# Altium PCB SERC_PCB_V2.PcbDoc
Units mil, origin at the board's own origin, x right, y up, seen from the top; angles counter-clockwise.
Board outline 6000 x 4000 mil, 2 copper layers (Top Layer, Bottom Layer); 39 components, 43 nets, 150 pads, 12 vias.
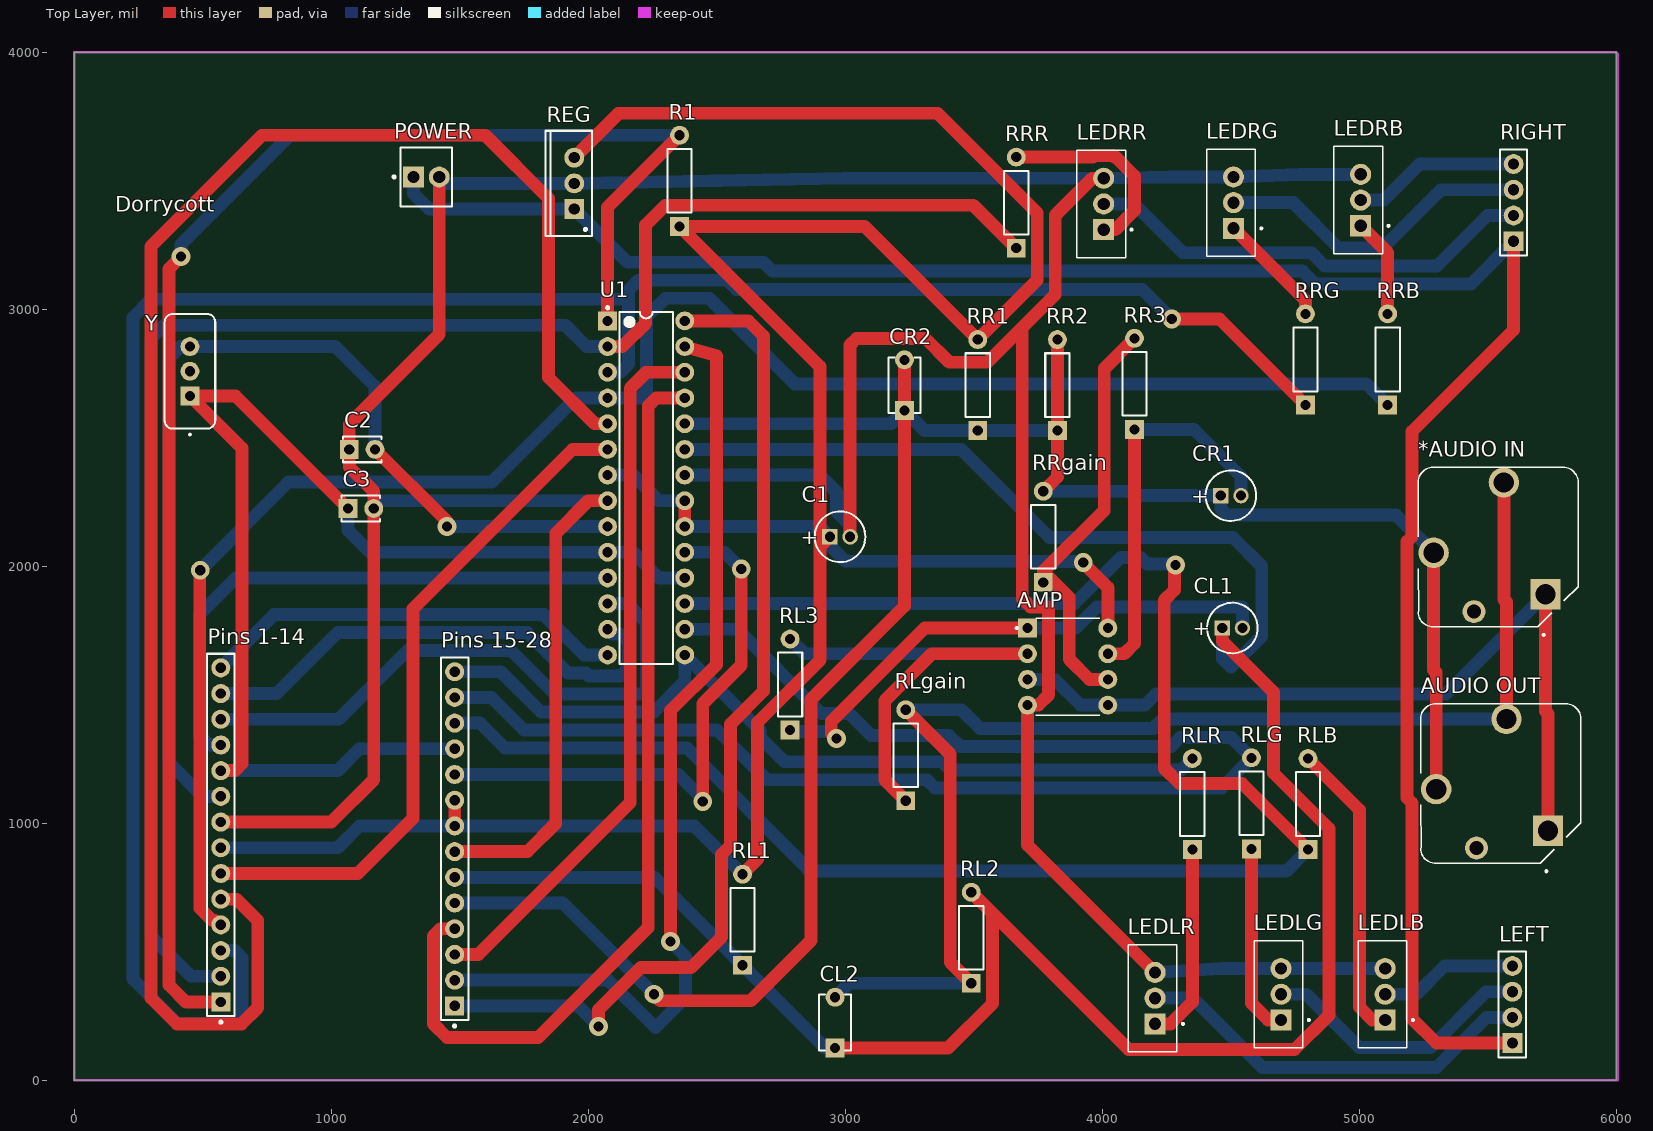
[diagram p0: Top Layer view]
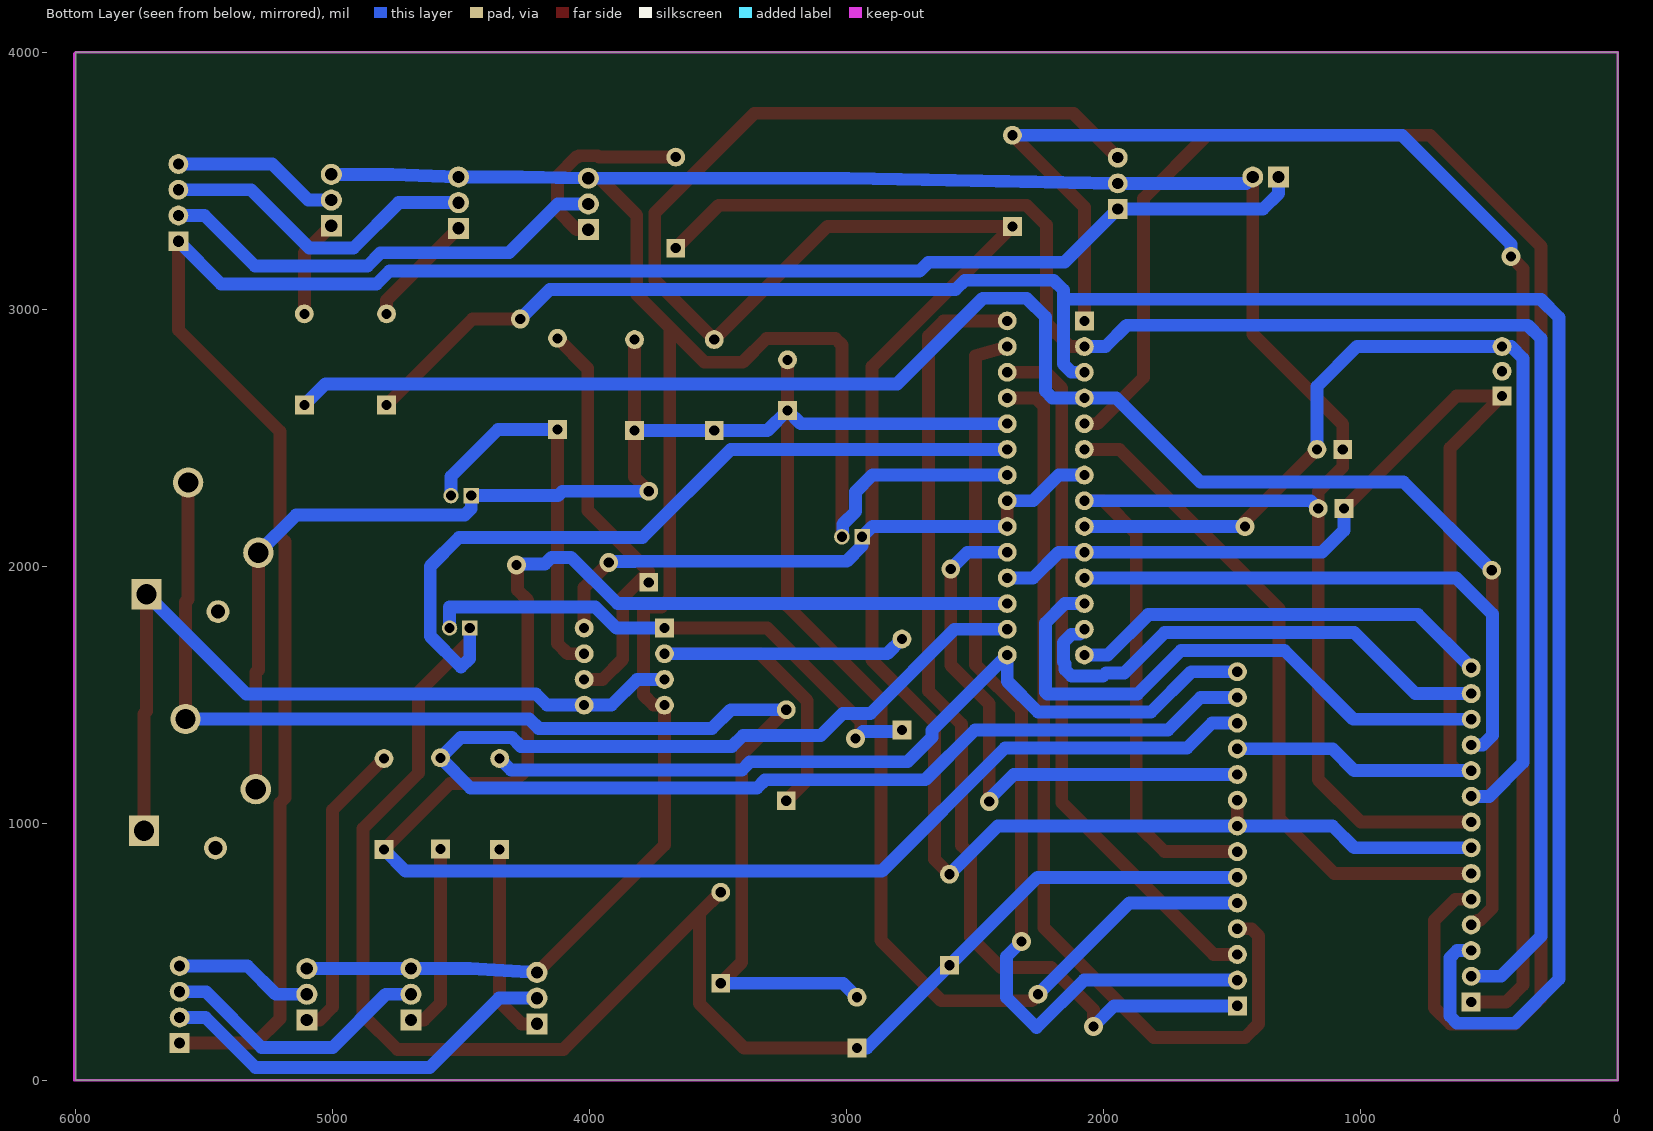
[diagram p1: Bottom Layer view, seen from below]

## Layer stack, top to bottom
Top Solder: solder mask 0.4, Solder Resist, Dk 3.5
Top Layer: signal copper 1.4
Dielectric 1: dielectric 12.6, FR-4, Dk 4.8
Bottom Layer: signal copper 1.4
Bottom Solder: solder mask 0.4, Solder Resist, Dk 3.5

## Board outline
0,0 6000,0 6000,4000 0,4000

## Design rules (kind name [scope] priority, off if disabled: settings)
BoardOutlineClearance [All] p1: gap=12 ignorepadtopadclearanceinfootprint=FALSE
Clearance [All] p1: gap=20 ignorepadtopadclearanceinfootprint=TRUE except(24: Arc-Via Track-Via SMDPad-Via THPad-Via Via-Via Via-Fill Via-Poly Via-Region Via-Text Via-Hole)
DiffPairsRouting [All] p1: maxlimit=10 minlimit=7 mostfreqgap=10 toplayer_minwidth=6 toplayer_maxwidth=15 toplayer_prefwidth=8 bottomlayer_minwidth=6 bottomlayer_maxwidth=15 bottomlayer_prefwidth=8 maxuncoupledlength=500
HoleSize [All] p1: absolutevalues=TRUE maxlimit=1000 minlimit=39.37 maxpercent=80.000 minpercent=20.000
HoleToHoleClearance [All] p1: gap=17 allowstackedmicrovias=TRUE
MinimumAnnularRing [All] p1: minimumring=17
PolygonConnect [All] p1: connectstyle=Relief reliefconductorwidth=10 reliefentries=4 polygonreliefangle="90 Angle" airgapwidth=10
RoutingVias [All] p1: holewidth=30 width=35 viastyle="Through Hole" minholewidth=10 minwidth=11 maxholewidth=255 maxwidth=250
SilkToSilkClearance [All] p1: silktosilkclearance=0
SolderMaskExpansion SolderMaskExpansion_1 [All] p1: expansion=4 istentingtop=FALSE
Width [All] p1: maxlimit=10000 minlimit=30 preferedwidth=50 minimp=50.000000 maximp=50.000000 favimp=50.000000
26 further rules are at their usual default settings.

## Components (designator, comment, footprint, x,y, rotation, side; value= is the part's Value field where it differs from the comment)
"*AUDIO IN" "ACJS-MV35-3S" AMPHENOL_ACJM-MV35-2S 5540,2075 r0 top
AMP "TLE2082CP" DIP794W45P254L959H508Q8 3865,1610 r0 top
"AUDIO OUT" "ACJS-MV35-3S" AMPHENOL_ACJM-MV35-2S 5550,1155 r0 top
C1 ".1uF" CAPPR55-200-1100X500X1200#1 2979.37,2115 r0 top
C2 "22pF" KEMT-C315-THT-2 1120,2455 r0 top
C3 "22pF" KEMT-C315-THT-2 1115,2225 r0 top
CL1 "10uF" CAPPR55-200-1100X500X1200#2 4505.63,1760 r0 top
CL2 "47nF" FP-RDE2M1-MFG 2960,225 r90 top
CR1 "10uF" CAPPR55-200-1100X500X1200#2 4500,2275 r0 top
CR2 "47nF" FP-RDE2M1-MFG 3230,2705 r90 top
LEDLB "TIP31G" TO254P1060X482X2222-3 5100,335 r90 top
LEDLG "TIP31G" TO254P1060X482X2222-3 4695,335 r90 top
LEDLR "TIP31G" TO254P1060X482X2222-3 4205,320 r90 top
LEDRB "TIP31G" TO254P1060X482X2222-3 5005,3425 r90 top
LEDRG "TIP31G" TO254P1060X482X2222-3 4510,3415 r90 top
LEDRR "TIP31G" TO254P1060X482X2222-3 4005,3410 r90 top
LEFT "61300411121" 61300411121 5595,295 r90 top
"Pins 1-14" "22-28-4146" FP-22-28-4146-MFG 570,955 r90 top
"Pins 15-28" "22-28-4146" FP-22-28-4146-MFG 1480,940 r90 top
POWER "22-27-2021" MOLX-22-27-2021_V 1370,3515 r0 top
R1 "10K" RESA60-630X240 2355,3500 r90 top
REG "7805" TO220 1945,3490 r90 top
RIGHT "6" 61300411121 5600,3415 r90 top
RL1 "100K" RESA60-630X240 2600,625 r90 top
RL2 "100K" RESA60-630X240 3490,555 r90 top
RL3 "100K" RESA60-630X240 2785,1540 r90 top
RLB "1K" RESA60-630X240 4800,1075 r90 top
RLG "1K" RESA60-630X240 4580,1077.83 r90 top
RLgain "10K" RESA60-630X240 3235,1265 r90 top
RLR "1K" RESA60-630X240 4350,1075 r90 top
RR1 "100K" RESA60-630X240 3515,2705 r90 top
RR2 "100K" RESA60-630X240 3825,2705 r90 top
RR3 "100K" RESA60-630X240 4125,2710 r90 top
RRB "1K" RESA60-630X240 5110,2805 r90 top
RRG "1K" RESA60-630X240 4790,2805 r90 top
RRgain "10K" RESA60-630X240 3770,2115 r90 top
RRR "1K" RESA60-630X240 3665,3415 r90 top
U1 "ATMEGA328P-PU" ATML-28P3 2225,2305 r0 top
Y "16 kHz" ECS-4X-3IL 450,2758.94 r90 top

## Footprints (in the part's own frame and the unit in brackets; to place one, negate y for a bottom-side part, rotate by r counter-clockwise, add the part's x,y. Pads: shape width x height; smd on the part's side, far side on the other; paste and mask are expansions set on the pad)
61300411121 [mm] "Pin Header, pitch 2.54 mm, THT, Vertical, single row, 4p"
  rect 1.964x1.964 hole 1.1: 1(-3.81,0)
  round 1.964 hole 1.1: 2(-1.27,0) 3(1.27,0) 4(3.81,0)
  silkscreen extent -5.23,-1.34 5.23,1.34, body extent -5.08,-1.27 5.08,1.27, height 8.57
AMPHENOL_ACJM-MV35-2S [mm]
  rect 3x3 / inner round 3 / far side rect 3x3 hole 2: 1(4.67,-4.67)
  round 2.264 hole 1.4: 2(-2.4,-6.38)
  round 3 hole 2: 3(-6.38,-0.56) 4(0.56,6.38)
  silkscreen extent -7.9,-8.77 7.9,7.9
ATML-28P3 [mm] "DIP, 28-Leads, Body 34.8x7.2mm, Pitch 2.54mm"
  rect 1.864x1.864 hole 1: 1(-3.81,16.51)
  round 1.864 hole 1: 2(-3.81,13.97) 3(-3.81,11.43) 4(-3.81,8.89) 5(-3.81,6.35) 6(-3.81,3.81) 7(-3.81,1.27) 8(-3.81,-1.27) 9(-3.81,-3.81) 10(-3.81,-6.35) 11(-3.81,-8.89) 12(-3.81,-11.43) 13(-3.81,-13.97) 14(-3.81,-16.51) 15(3.81,-16.51) 16(3.81,-13.97) 17(3.81,-11.43) 18(3.81,-8.89) 19(3.81,-6.35) 20(3.81,-3.81) 21(3.81,-1.27) 22(3.81,1.27) 23(3.81,3.81) 24(3.81,6.35) 25(3.81,8.89) 26(3.81,11.43) 27(3.81,13.97) 28(3.81,16.51)
  silkscreen extent -3.93,-17.4 2.65,17.93, body extent -3.95,-17.4 3.95,17.4, height 4.58
CAPPR55-200-1100X500X1200#1 [mm] "THD, 2-Leads, Dia 5mm, Body Length 11mm"
  rect 1.529x1.529 hole 1: 1(-1,0)
  round 1.529 hole 1: 2(1,0)
  silkscreen extent -2.5,-2.5 2.5,2.5, body extent -2.5,-2.5 2.5,2.5, height 12
CAPPR55-200-1100X500X1200#2 [mm] "THD, 2-Leads, Dia 5mm, Body Length 11mm"
  rect 1.524x1.524 hole 1: 1(-1,0)
  round 1.524 hole 1: 2(1,0)
  silkscreen extent -2.5,-2.5 2.5,2.5, body extent -2.5,-2.5 2.5,2.5, height 12
DIP794W45P254L959H508Q8 [mm]
  rect 1.864x1.864 hole 1: 1(-3.97,3.81)
  round 1.864 hole 1: 2(-3.97,1.27) 3(-3.97,-1.27) 4(-3.97,-3.81) 5(3.97,-3.81) 6(3.97,-1.27) 7(3.97,1.27) 8(3.97,3.81)
  silkscreen extent -5.13,-4.8 3.17,4.8
ECS-4X-3IL [mm]
  rect 1.864x1.864 hole 1: 1(-2.44,0)
  round 1.864 hole 1: 2(0,0) 3(2.44,0)
  silkscreen extent -6.34,-2.5 5.68,2.5, body extent -5.68,-2.5 5.68,2.5, height 3.5
FP-22-28-4146-MFG [mm]
  rect 1.884x1.884 hole 1.02 paste-1000 mask+0: 1(-16.51,0)
  round 1.884 hole 1.02 paste-1000 mask+0: 2(-13.97,0) 3(-11.43,0) 4(-8.89,0) 5(-6.35,0) 6(-3.81,0) 7(-1.27,0) 8(1.27,0) 9(3.81,0) 10(6.35,0) 11(8.89,0) 12(11.43,0) 13(13.97,0) 14(16.51,0)
  silkscreen extent -18.63,-1.37 17.91,1.37, body extent -18.01,-1.47 18.01,1.47, height 0.25
FP-RDE2M1-MFG [mm]
  rect 1.864x1.864 hole 1 paste-1000 mask+0: 1(-2.5,0)
  round 1.864 hole 1 paste-1000 mask+0: 2(2.5,0)
  silkscreen extent -2.75,-1.58 2.75,1.58, body extent -3.2,-1.68 3.2,1.68, height 0.25
KEMT-C315-THT-2 [mm] "THD, 2-Leads, Body 3.81x2.54mm"
  rect 1.864x1.864 hole 1: 1(-1.27,0)
  round 1.864 hole 1: 2(1.27,0)
  silkscreen extent -1.91,-1.27 1.91,1.27, body extent -1.91,-1.27 1.91,1.27, height 4.66
MOLX-22-27-2021_V [mm] "Header, 2-Leads, Body 5.8x5.08mm"
  rect 2.054x2.054 hole 1.19: 1(-1.27,0)
  round 2.054 hole 1.19: 2(1.27,0)
  silkscreen extent -3.31,-2.9 2.54,2.9, body extent -2.54,-2.9 2.54,2.9, height 11.72
RESA60-630X240 [mm] "Axial Resistor, 2-Leads, Dia 2.4mm, Body Length 6.3mm"
  rect 1.864x1.864 hole 1: 1(-4.5,0)
  round 1.864 hole 1: 2(4.5,0)
  silkscreen extent -3.15,-1.2 3.15,1.2, body extent -3.15,-1.2 3.15,1.2, height 2.4
TO220 [mm] "TO, Thru-Hole, Vertical, Heatsink Mounted; 3 In-Line Leads; Pitch 2.54 mm"
  rect 1.964x1.964 hole 1.1: 1(-2.54,0)
  round 1.964 hole 1.1: 2(0,0) 3(2.54,0)
  silkscreen extent -5.2,-1.75 5.2,2.85, body extent -5.25,-1.8 5.25,2.9, height 19.7
TO254P1060X482X2222-3 [mil]
  rect 82x82 hole 48: 1(-100,0)
  round 82 hole 48: 2(0,0) 3(100,0)
  silkscreen extent -209,-112 209,105, body extent -196,-69 196,106, height 775

## Part data
"*AUDIO IN" "AUDIO OUT": library part CMP-00027-00002-1, "Conn 3.5MM Audio Jack F 3 POS Solder ST Thru-Hole 4 Terminal 1 Port"
AMP: Package=None, Availability=Unavailable, MP=TLE2082CP, Price=None
C1: library part CMP-1665-00038-2, "Aluminum Electrolytic Capacitor, 10 uF, +/- 20%, 50 V, -40 to 85 degC, 2-Pin THD, RoHS, Bulk", Capacitance=10uF, Case/Package=Radial, Dielectric Material=Aluminium, Leakage Current=3uA, Manufacturer=Panasonic, Max Operating Temperature=85degC, Min Operating Temperature=-40degC, Package Description="2-Pin Radial Lead, Dia 5 mm, Height 12 mm", Package Quantity=200, Package Reference=CAPPR55-200-1100X500X1200, Ripple Current=65mA, Tolerance=20%, Voltage=50V, Datasheet URL=https://industrial.panasonic.com/cdbs/www-data/pdf/RDF0000/ABA0000C1218.pdf, Datasheet Version="Rev. 05, 10/2016", Diameter=5mm, Dissipation Factor=0.12%, Height=11mm, Height - Seated (Max)=0.472inch, Lead Diameter=0.5mm, Lead Free=LeadFree, Lead Pitch=2mm, Lead/Base Style=Straight, Length=11mm, Life (Hours)=2000Hour, Manufacturer URL=http://www.panasonic.com/, Mount=ThroughHole, Number of Pins=2, Packaging=Bulk, Radiation Hardening=No, REACH SVHC=NoSVHC, Ripple Current (AC)=65mA, RoHSCompliant=true, Termination=Radial, Voltage Rating=50V, Voltage Rating (DC)=50V
C2 C3: library part CMP-1664-00008-1, "Capacitor, Ceramic, 22 pF, +/-10 %, 100 V, -55 to 125 degC, 2-Pin THD, RoHS, Bulk", Case\Package=TO-220, Max Input Voltage="40 V", Max Operating Temperature="125 degC", Max Ouput Current="1.5 A", Min Input Voltage="4.2 V", Min Operating Temperature="0 degC", Output Voltage="1.2 V", Package Quantity=50, ComponentLink1Description="Manufacturer URL", ComponentLink1URL=http://www.kemet.com/, ComponentLink2Description=Datasheet, ComponentLink2URL=http://capacitoredge.kemet.com/capedge2/DataSheet/Datasheet-C315C220K1G5TA.pdf?pn=C315C220K1G5TA{BULK}, DatasheetVersion=Aug-16, Height="9.28 mm", Length="10.28 mm", Mount="Through Hole", Output Current="1.5 A", Outputs=1, PackageDescription="2-Pin Through Hole Device, Body 3.81 x 2.54 mm", PackageReference=C315-THT-2, Packaging=Rail/Tube, Pins=3, Radiation Hardening=No, REACH SVHC="No SVHC", RoHSCompliant=true, Weight="0.08113 oz", Width="4.82 mm"
CL1 CR1: library part CMP-1665-00038-2, "Aluminum Electrolytic Capacitor, 10 uF, +/- 20%, 50 V, -40 to 85 degC, 2-Pin THD, RoHS, Bulk", Case/Package=Radial, Dielectric Material=Aluminium, Leakage Current=3uA, Manufacturer=Panasonic, Max Operating Temperature=85degC, Min Operating Temperature=-40degC, Package Description="2-Pin Radial Lead, Dia 5 mm, Height 12 mm", Package Quantity=200, Package Reference=CAPPR55-200-1100X500X1200, Ripple Current=65mA, Tolerance=20%, Voltage=50V, Capacitance=10uF, Datasheet URL=https://industrial.panasonic.com/cdbs/www-data/pdf/RDF0000/ABA0000C1218.pdf, Datasheet Version="Rev. 05, 10/2016", Diameter=5mm, Dissipation Factor=0.12%, Height=11mm, Height - Seated (Max)=0.472inch, Lead Diameter=0.5mm, Lead Free=LeadFree, Lead Pitch=2mm, Lead/Base Style=Straight, Length=11mm, Life (Hours)=2000Hour, Manufacturer URL=http://www.panasonic.com/, Mount=ThroughHole, Number of Pins=2, Packaging=Bulk, Radiation Hardening=No, REACH SVHC=NoSVHC, Ripple Current (AC)=65mA, RoHSCompliant=true, Termination=Radial, Voltage Rating=50V, Voltage Rating (DC)=50V
CL2 CR2: library part CMP-06035-044503-1, "Ceramic Capacitor 47nF ±10% 450V X7T Radial", Capacitance=47nF, Case/Package=Radial, Dielectric=X7T, Max Operating Temperature=125°C, Min Operating Temperature=-55°C, Tolerance=10%, Voltage Rating=450V, Lead Pitch=5mm, REACH SVHC="No SVHC", Voltage Rating (DC)=450V
LEDLB LEDLG LEDLR LEDRB LEDRG LEDRR: "Bipolar (BJT) Transistor NPN 40 V 3 A 3MHz 2 W Through Hole TO-220", Package="TO-220-3 ON Semiconductor", Availability="In Stock", Check_prices=https://www.snapeda.com/parts/TIP31G/Onsemi/view-part/?ref=eda, MF="ON Semiconductor", MP=TIP31G, Price=None, Purchase-URL=https://pricing.snapeda.com/search/part/TIP31G/?ref=eda, SnapEDA_Link=https://www.snapeda.com/parts/TIP31G/Onsemi/view-part/?ref=snap
LEFT: library part CMP-1502-01064-1, "THT Vertical Pin Header WR-PHD, Pitch 2.54 mm, Single Row, 4 pins", Contact Resistance=20mOhm, Manufacturer="Wurth Elektronik", Operating Temperature=-40to105degC, Rated Current=3A, Withstanding Voltage=500VAC, Working Voltage=250VAC, Datasheet URL=https://katalog.we-online.de/em/datasheet/6130xx11121.pdf, Gender=Male, Manufacturer URL=http://www.we-online.de, Mounting Technology=THT, Orientation=Vertical, Package Reference=61300411121, Packaging=Bag, Part Number=61300411121, Pin Number=4, Pitch=2.54mm, Publisher=WurthElektronik, Row Number=Single
"Pins 1-14" "Pins 15-28": library part CMP-04776-000356-1, "CONN HEADER VERT 14POS 2.54MM", Color=Black, Current Rating=4A, Package Quantity=1, Voltage Rating=250V, Connector Type="Male Pin", Contact Gender=Male, Contact Material=Brass, Contact Mating Length=0.24inch, Contact Plating=Gold, Contact Type="Male Pin", Gender=Male, Glow Wire Compliant=Non-compliant, Height=2.29mm, Housing Color=Black, Housing material=Thermoplastic, Lead Free="Lead Free", Length=35.6mm, Mount="Through Hole", Number of Circuits=14, Number of Contacts=14, Number of Positions=14, Number of Rows=1, Orientation=Vertical, Packaging=Bulk, Pitch=0.1inch, RoHS Compliant=Yes, Series="KK® 42375", Termination=Solder, Width=2.49mm
POWER: library part CMP-2000-05537-1, "Male Header, Pitch 2.54 mm, 1 x 2 Position, Height 11.7 mm, Tail Length 3.56 mm, 0 to 75 degC, RoHS, Bulk", Current - Max=4A, Manufacturer=Molex, Operating Temperature=0°Cto+75°C, Package Description="2-Leads Header, Body 5.08 x 5.8 mm, Pitch 2.54 mm", Package Version="Rev. BC, 02/2012", PartNumber=0022272021, Voltage - Max=250V, Contact Material=Tinplatedbrass, Current Rating=4A, Datasheet URL=http://www.molex.com/pdm_docs/sd/022272021_sd.pdf, Datasheet Version="Rev. F, 06/2009", Housing material=Nylon(UL94V-0), Manufacturer URL=http://www.molex.com/, Mounting Technology=ThroughHole, No. of Positions=2, No. of Rows=1, Orientation=Vertical, Package Reference=22-27-2021, Pitch=2.54mm, Voltage Rating=250V
R1 RL1 RL2 RL3 RLB RLG RLgain RLR RR1 RR2 RR3 RRB RRG RRgain RRR: library part CMP-1659-00073-1, "Axial Resistor, 100 KOhm, +/- 1%, 0.25 W, -55 to 155 degC, 2-Pin THD, RoHS, Bulk", Case\Package=Axial, Max Operating Temperature="155 degC", Min Operating Temperature="-55 degC", Package Quantity=200, Power Rating="250 mW", Resistance="475 Ohm", Tolerance=1%, Voltage Rating="250 V", ComponentLink1Description="Manufacturer URL", ComponentLink1URL=http://www.yageo.com/, ComponentLink2Description=Datasheet, ComponentLink2URL=http://www.yageo.com/documents/recent/Yageo%20LR_MFR_2013.pdf, DatasheetVersion=Apr-13, Length="0.248 inch", Mount="Through Hole", PackageDescription="2-Pin Axial Lead, Dia 2.4 mm, Body Length 6.3 mm", PackageReference=MFR-25, Packaging=Bulk, RoHSCompliant=true
REG: library part CMP-0244-00483-1, "Positive Voltage Regulator, 5V, 3-Pin TO-220", ComponentLink1Description="Manufacturer URL", ComponentLink1URL=http://www.st.com, ComponentLink2Description=Datasheet, ComponentLink2URL=http://www.st.com/internet/com/TECHNICAL_RESOURCES/TECHNICAL_LITERATURE/DATASHEET/CD00000444.pdf, ComponentLink3Description="Package Specification", ComponentLink3URL=http://www.st.com/internet/com/TECHNICAL_RESOURCES/TECHNICAL_LITERATURE/PACKAGE_INFORMATION/CD00004649.pdf, DatasheetVersion=16/11/2011, PackageDescription="TO, Thru-Hole, Vertical, Heatsink Mounted; 3 In-Line Leads; Pitch 2.54 mm", PackageReference=TO220, PackageVersion=ver3.0
RIGHT: library part CMP-1502-01064-1, "THT Vertical Pin Header WR-PHD, Pitch 2.54 mm, Single Row, 4 pins", Contact Resistance=20mOhm, Manufacturer="Wurth Elektronik", Operating Temperature=-40to105degC, Package Reference=61300411121, Rated Current=3A, Withstanding Voltage=500VAC, Working Voltage=250VAC, Datasheet URL=https://katalog.we-online.de/em/datasheet/6130xx11121.pdf, Gender=Male, Manufacturer URL=http://www.we-online.de, Mounting Technology=THT, Orientation=Vertical, Packaging=Bag, Part Number=61300411121, Pin Number=4, Pitch=2.54mm, Publisher=WurthElektronik, Row Number=Single
U1: library part CMP-020-00004-3, "8-Bit Microcontroller with 32 KBytes In-System Programmable Flash, 23 I/Os, -40 to 85 degC, 28-Pin PDIP (28P3), RoHS, Tube", Case/Package=DIP, Manufacturer=Atmel, Max Clock Frequency=20MHz, Max Operating Temperature=85°C, Max Supply Voltage=5.5V, Min Operating Temperature=-40°C, Min Supply Voltage=1.8V, Package Description="28-Pin Plastic Dual Inline Package, Body 34.671 x 7.3025 mm, Pitch 2.54 mm", Package Quantity=14, Package Reference=28P3, Package Version="Rev. B, 09/2001", Datasheet URL=http://www.atmel.com/images/Atmel-8271-8-bit-AVR-Microcontroller-ATmega48A-48PA-88A-88PA-168A-168PA-328-328P_datasheet_Complete.pdf, Datasheet Version="Rev. 8271J, 11/2015", Density=32KB, Ethernet Channels=0, I/Os=23, Interface=USART, Manufacturer URL=http://www.atmel.com/, Mounting Technology=TH, Package URL=http://www.atmel.com/images/Atmel-8271-8-bit-AVR-Microcontroller-ATmega48A-48PA-88A-88PA-168A-168PA-328-328P_datasheet_Complete.pdf, Packaging=Rail/Tube, Pins=28, RAM Size=2KB, RoHS Compliant=True
Y: library part CMP-1669-00002-2, "CRYSTAL 8.00 MHZ 20PF 49US", Manufacturer=ECS, PartNumber=ECS-80-20-4X, ComponentLink1Description=Datasheet, ComponentLink1URL=http://www.ecsxtal.com/store/pdf/hc-49usx.pdf, PackageReference=4X-3IL

## Via types
v1: diameter 73.37, hole 39.37, Top Layer to Bottom Layer, 12 vias

## Nets (pads, with @x,y where several pads share a name; then routed paths per layer and width w, separated by ;. In a path a pad name is that pad's centre, name@x,y a point inside that pad or via, vN(x,y) a via of type N, cw(c..) or ccw(c..) an arc to the next point about the centre after c; other vN are vias at no path point)
"Net*AUDIO IN_1": "*AUDIO IN.1" "AUDIO OUT.1" AMP.3 AMP.5 | length 3159.3
  Top Layer w50: 5723.86,1891.14 5723.86,1436 5733.86,1426 5733.86,971.14
  Bottom Layer w50: AMP.3 3815,1560 3915,1460 AMP.5 4166,1460 4209,1503 5335.72,1503 5723.86,1891.14
"Net*AUDIO IN_3": "*AUDIO IN.3" "AUDIO OUT.3" "Pins 15-28.5" CR1.1 CR2.1 CR2.2 RR1.1 RR2.1 RR2.2 RRgain.2 U1.24 | length 8738.6
  Top Layer w50: v1(2255,335) 2280,310 2632,310 2867,545 2867,1483 3230,1846 CR2.1 CR2.2 ; RRgain.2 3825,2347.17 RR2.1 RR2.2 ; 5288.82,2052.95 5288.82,1597 5298.82,1587 5298.82,1132.95
  Bottom Layer w50: 1480,690 1900,690 v1(2255,335) ; U1.24 3178.43,2555 CR2.1 3308.74,2527.83 RR1.1 RR2.1 ; RRgain.2 4106,2292.17 4123.17,2275 CR1.1 4460.63,2225 4485.63,2200 5141.77,2200 5288.82,2052.95
"Net*AUDIO IN_4": "*AUDIO IN.4" "AUDIO OUT.4" CL2.2 RL2.1 RLgain.2 | length 5028.9
  Top Layer w50: RLgain.2 3408,1269.17 3408,459.83 RL2.1 ; 5562.05,2326.18 5562.05,1871 5572.05,1861 5572.05,1406.18
  Bottom Layer w50: CL2.2 3014.41,377.83 RL2.1 ; RLgain.2 3451.02,1442.17 3523.53,1369.65 4198.31,1369.65 4234.85,1406.18 5572.05,1406.18
NetAMP_1: AMP.1 CL1.2 RL3.1 | length 2134.6
  Top Layer w50: v1(2965,1330) 2945,1350 2945,1396 3309,1760 AMP.1
  Bottom Layer w50: RL3.1 2790.41,1357.43 2937.57,1357.43 v1(2965,1330) ; AMP.1 3896,1760 3978,1842 4545,1842 CL1.2
NetAMP_2: AMP.2 RL3.2 RLgain.1 | length 2002
  Top Layer w50: RLgain.1 3153,1169.83 3153,1477 3336,1660 AMP.2
  Bottom Layer w50: RL3.2 2842.17,1660 AMP.2
NetAMP_4: "Pins 1-14.8" "Pins 15-28.7" AMP.4 C1.2 C2.1 C3.2 LEDLB.3 LEDLG.3 LEDLR.3 LEDRB.3 LEDRG.3 LEDRR.3 POWER.2 REG.2 U1.8 U1.22 | length 16356.9
  Top Layer w50: 570,1005 1000,1005 1165,1170 C3.2 1165,2292 1070,2387 C2.1 1070,2553 1420,2903 POWER.2 ; 1480,890 1763,890 1873,1000 1873,2128 2000,2255 U1.8 ; C1.2 3018.74,2861.74 3043,2886 3312,2886 3404,2794 3553.07,2794 3688,2928.93 ; LEDRR.3 3961,3510 3816.69,3365.69 3816.69,3057.62 3688,2928.93 ; LEDLR.3 3708.7,916.3 AMP.4 3751,1460 3791,1500 3791,1842 3721,1842 3688,1875 3688,2928.93
  Bottom Layer w50: C3.2 1195,2255 U1.8 ; POWER.2 1445,3490 REG.2 2995,3510 LEDRR.3 4263,3515 LEDRG.3 4768,3525 LEDRB.3 ; U1.22 2900,2355 2965,2290 2965,2213.82 3015.09,2163.73 3015.09,2125.85 3016.79,2124.15 3016.79,2116.95 C1.2 ; LEDLR.3 4465,435 LEDLG.3 LEDLB.3
NetAMP_6: AMP.6 RR3.2 RRgain.1 | length 1661.9
  Top Layer w50: AMP.6 3950,1560 3871.24,1638.76 3871.24,1878.38 3790.9,1958.73 RRgain.1 3770,1980.5 4007,2217.5 4007,2769.17 RR3.2
NetAMP_7: AMP.7 CR1.2 RR3.1 | length 1518.2
  Top Layer w50: AMP.7 4085,1660 4125,1700 RR3.1
  Bottom Layer w50: RR3.1 4356.54,2532.83 4539.37,2350 CR1.2
NetAMP_8: "Pins 1-14.7" "Pins 15-28.8" "Pins 15-28.9" AMP.8 C1.1 R1.1 REG.3 RL1.2 RR1.2 U1.7 U1.20 U1.21 | length 11499.9
  Top Layer w50: 1480,990 1480,1090 ; REG.3 2118,3763 3358,3763 3746.69,3374.31 3746.69,3113.85 RR1.2 3074.33,3322.83 R1.1 2901,2776.83 2901,2076 ; U1.20 U1.21 ; RL1.2 2658,860.17 2658,1392 2901,1635 2901,2076 ; C1.1 2901,2076 ; v1(3925.68,2015) 3925.68,2012.94 4021.3,1917.32 AMP.8
  Bottom Layer w50: 570,905 1025,905 1110,990 1480,990 2412.17,990 RL1.2 ; U1.7 2175,2355 2275,2255 U1.21 ; U1.20 2900,2155 C1.1 2940,2080 3000,2020 3824.84,2020 3825.37,2019.47 3921.21,2019.47 v1(3925.68,2015)
NetC2_2: "Pins 1-14.9" C2.2 U1.9 Y.3 | length 3999.9
  Top Layer w50: C2.2 1450,2175 v1(1450,2155)
  Bottom Layer w50: 570,1105 500,1105 368,1237 368,2809 414,2855 Y.3 1015,2855 1170,2700 C2.2 ; v1(1450,2155) U1.9
NetC3_1: "Pins 1-14.10" "Pins 15-28.11" C3.1 U1.10 U1.18 Y.1 | length 4821.8
  Top Layer w50: 570,1205 625,1205 653,1233 653,2459.87 Y.1 627.13,2662.87 C3.1
  Bottom Layer w50: 570,1205 1025,1205 1110,1290 1480,1290 ; C3.1 1065,2140 1150,2055 U1.10 2175,2055 2275,1955 U1.18
NetCL1_1: "Pins 15-28.6" CL1.1 CL2.1 RL1.1 RL2.2 U1.23 | length 9209.8
  Top Layer w50: CL2.1 3400,126.57 3572,298.57 3572,650.17 ; RL2.2 3572,650.17 ; CL1.1 4466.26,1709.74 4666,1510 4666,1195.69 4881.69,980 4881.69,253.69 4748,120 4102.17,120 3572,650.17
  Bottom Layer w50: 1480,790 2257.83,790 RL1.1 2921.26,126.57 CL2.1 ; U1.23 3451,2455 3794,2112 4508,2112 4620,2000 4620,1728 4500,1608 4466.26,1641.74 CL1.1
NetLEDLB_1: LEDLB.1 RLB.2 | length 1170.7
  Top Layer w50: RLB.2 5000,1052.17 5000,285 5050,235 LEDLB.1
NetLEDLB_2: LEDLB.2 LEFT.4 | length 540.6
  Bottom Layer w50: LEDLB.2 5221,335 5331,445 LEFT.4
NetLEDLG_1: LEDLG.1 RLG.1 | length 742.6
  Top Layer w50: RLG.1 4580,300 4645,235 LEDLG.1
NetLEDLG_2: LEDLG.2 LEFT.3 | length 1075.4
  Bottom Layer w50: LEDLG.2 4793,335 4999.69,128.31 5276.31,128.31 5493,345 LEFT.3
NetLEDLR_1: LEDLR.1 RLR.1 | length 773
  Top Layer w50: LEDLR.1 4265,220 4350,305 RLR.1
NetLEDLR_2: LEDLR.2 LEFT.2 | length 1582.6
  Bottom Layer w50: LEDLR.2 4352,320 4622,50 5300,50 5495,245 LEFT.2
NetLEDRB_1: LEDRB.1 RRB.2 | length 386.3
  Top Layer w50: LEDRB.1 5110,3220 RRB.2
NetLEDRB_2: LEDRB.2 RIGHT.4 | length 653
  Bottom Layer w50: LEDRB.2 5095,3425 5235,3565 RIGHT.4
NetLEDRG_1: LEDRG.1 RRG.2 | length 448.8
  Top Layer w50: LEDRG.1 4790,3035 RRG.2
NetLEDRG_2: LEDRG.2 RIGHT.3 | length 1256.5
  Bottom Layer w50: LEDRG.2 4743,3415 4919,3239 5091,3239 5317,3465 RIGHT.3
NetLEDRR_1: LEDRR.1 RRR.2 | length 779.6
  Top Layer w50: RRR.2 3963.72,3592.17 3968.84,3597.29 4041.16,3597.29 4046.28,3592.17 4051.83,3592.17 4125,3519 4125,3385 4050,3310 LEDRR.1
NetLEDRR_2: LEDRR.2 RIGHT.2 | length 1776
  Bottom Layer w50: LEDRR.2 4124,3410 4314,3220 4813.3,3220 4864.3,3169 5302,3169 5498,3365 RIGHT.2
NetLEFT_1: LEFT.1 POWER.1 REG.1 RIGHT.1 | length 8193.9
  Top Layer w50: LEFT.1 5300,145 5205,240 5205,1079.61 5184.76,1099.85 5184.76,2096.05 5205,2116.29 5205,2525 5600,2920 RIGHT.1
  Bottom Layer w50: POWER.1 1320,3450 1380,3390 REG.1 2152,3183 2682,3183 2716,3149 4779,3149 4829,3099 5434,3099 RIGHT.1
"NetPins 1-14_1": "Pins 1-14.1" R1.2 U1.1 | length 6084.6
  Top Layer w50: v1(415,3205) 368,3158 368,371 434,305 570,305 ; U1.1 2075,3397.17 R1.2
  Bottom Layer w50: v1(415,3205) 415,3253 839.17,3677.17 R1.2
"NetPins 1-14_2": "Pins 1-14.2" RRR.1 U1.2 | length 6605.4
  Top Layer w50: U1.2 2132,2855 2223,2946 2223,3328 2300,3405 3497.83,3405 RRR.1
  Bottom Layer w50: 570,405 454,405 298,561 298,2886 350,2938 1910,2938 1993,2855 U1.2
"NetPins 1-14_3": "Pins 1-14.3" RRG.1 U1.3 | length 8594.7
  Top Layer w50: v1(4270,2962) 4455.83,2962 RRG.1
  Bottom Layer w50: 570,505 625,505 653,477 653,250 625,222 400,222 228,394 228,2968 299,3039 2156.69,3039 ; U1.3 2125,2755 2156.69,2786.69 2156.69,3039 ; v1(4270,2962) 4155,3077 2576,3077 2540,3113 2194.69,3113 2156.69,3075 2156.69,3039
"NetPins 1-14_4": "Pins 1-14.4" RRB.1 U1.4 | length 6823.2
  Top Layer w50: v1(490,1985) 487.92,1982.92 487.92,671 536,622.92 545.54,622.92 563.46,605 570,605
  Bottom Layer w50: v1(490,1985) 833,2328 1624,2328 1951,2655 U1.4 2200,2655 2226.69,2681.69 2226.69,2969.69 2300,3043 2470,3043 2803,2710 5027.83,2710 RRB.1
"NetPins 1-14_5": "Pins 1-14.5" U1.5 | length 6754.5
  Top Layer w50: 570,705 631,705 714,622 714,283 650,219 400,219 298,321 298,3245 730,3677 1599,3677 1845,3431 1845,2735 2025,2555 U1.5
"NetPins 1-14_6": "Pins 1-14.6" U1.6 | length 2665.9
  Top Layer w50: 570,805 1103,805 1318,1020 1318,1835 1938,2455 U1.6
"NetPins 1-14_11": "Pins 1-14.11" U1.11 | length 2216.1
  Bottom Layer w50: 570,1305 525,1305 487,1343 487,1814 628,1955 U1.11
"NetPins 1-14_12": "Pins 1-14.12" U1.12 | length 2292.6
  Bottom Layer w50: 570,1405 1029,1405 1296.08,1672.08 1699.1,1672.08 1867.86,1503.31 2219.68,1503.31 2226.69,1510.32 2226.69,1780 2151.69,1855 U1.12
"NetPins 1-14_13": "Pins 1-14.13" U1.13 | length 1969.9
  Bottom Layer w50: 570,1505 787.92,1505 1025,1742.08 1762.68,1742.08 1919.76,1585 1991,1585 2002.69,1573.31 2125,1573.31 2150,1598.31 2150,1621 2156.69,1627.69 2156.69,1704.31 2125,1736 2094,1736 U1.13
"NetPins 1-14_14": "Pins 1-14.14" U1.14 | length 1655.8
  Bottom Layer w50: 570,1605 777.08,1812.08 1826.85,1812.08 1983.93,1655 U1.14
"NetPins 15-28_1": "Pins 15-28.1" U1.28 | length 3991.3
  Top Layer w50: v1(2040,210) 2040,275 2204,439 2400,439 2518,557 2518,879 2553,914 2553,1386 2682,1515 2682,2896 2623,2955 U1.28
  Bottom Layer w50: 1480,290 1960,290 v1(2040,210)
"NetPins 15-28_2": "Pins 15-28.2" U1.27 | length 3746.8
  Top Layer w50: v1(2320,540) 2320,1439 2498.38,1617.38 2498.38,2819.62 U1.27
  Bottom Layer w50: 1480,390 2076.5,390 2261.25,205.25 2378,322 2378,482 v1(2320,540)
"NetPins 15-28_3": "Pins 15-28.3" U1.26 | length 2777.5
  Top Layer w50: 1480,490 1572,490 2163,1081 2163,2693 2225,2755 U1.26
"NetPins 15-28_4": "Pins 15-28.4" U1.25 | length 3655.7
  Top Layer w50: 1480,590 1425,590 1397,562 1397,220 1450,167 1805,167 2233,595 2233,2624 2264,2655 U1.25
"NetPins 15-28_10": "Pins 15-28.10" U1.19 | length 2228.4
  Top Layer w50: v1(2445,1085) 2445,1465 2595,1615 v1(2595,1990)
  Bottom Layer w50: 1480,1190 2350,1190 2445,1095 v1(2445,1085) ; U1.19 2530,2055 v1(2595,1990)
"NetPins 15-28_12": "Pins 15-28.12" RLB.1 U1.17 | length 7089.5
  Top Layer w50: v1(4285,2005) 4280.53,2000.53 4280.53,1907.84 4241,1868.31 4241,1214 4300,1155 4542.83,1155 RLB.1
  Bottom Layer w50: 1480,1390 1578.91,1390 1675.6,1293.31 2383.93,1293.31 2863.24,814 4716.17,814 RLB.1 ; U1.17 3892,1855 4072,2035 4148.68,2035 4174.2,2009.47 4280.53,2009.47 v1(4285,2005)
"NetPins 15-28_13": "Pins 15-28.13" RLG.2 U1.16 | length 5734.7
  Bottom Layer w50: 1480,1490 1623.31,1490 1750,1363.31 2500.69,1363.31 2694.48,1169.52 3317,1169.52 3348.52,1138 4463,1138 RLG.2 4501.15,1333.85 4302.2,1333.85 4268,1299.65 3445.68,1299.65 3403.33,1342 3100.65,1342 3015.23,1427.43 2907.57,1427.43 2580,1755 U1.16
"NetPins 15-28_14": "Pins 15-28.14" RLR.2 U1.15 | length 3305.6
  Bottom Layer w50: 1480,1590 1658.91,1590 1815.6,1433.31 2255,1433.31 2375,1553.31 U1.15 2667.74,1362.26 2667.74,1335.26 2763.48,1239.52 3375.68,1239.52 3407.2,1208 4305.83,1208 RLR.2
pads on no net: "*AUDIO IN.2" "AUDIO OUT.2" Y.2

## Keep-outs
Keep-Out Layer:
  lines w10: 0,0 0,4000 6000,4000 6005,3995 6005,0 0,0

## Silkscreen, mask and mechanical layers (free items; w line width, h text height)
Top Overlay:
  text "Dorrycott" at 160,3379.99 h60

## Text inside footprints (layer, text, board x,y; h text height)
C1: Top Overlay "+" at 2825.51,2085.98 h59.06
CL1: Top Overlay "+" at 4351.77,1730.98 h59.06
CR1: Top Overlay "+" at 4346.14,2245.98 h59.06